# Altium PCB NFC_Business_Card.PcbDoc
Units mil, origin at the board's own origin, x right, y up, seen from the top; angles counter-clockwise.
Board outline 3500 x 2000 mil, 2 copper layers (Top Layer, Bottom Layer); 28 components, 25 nets, 82 pads, 18 vias.
Unrouted connection lines stored in the file: 1.
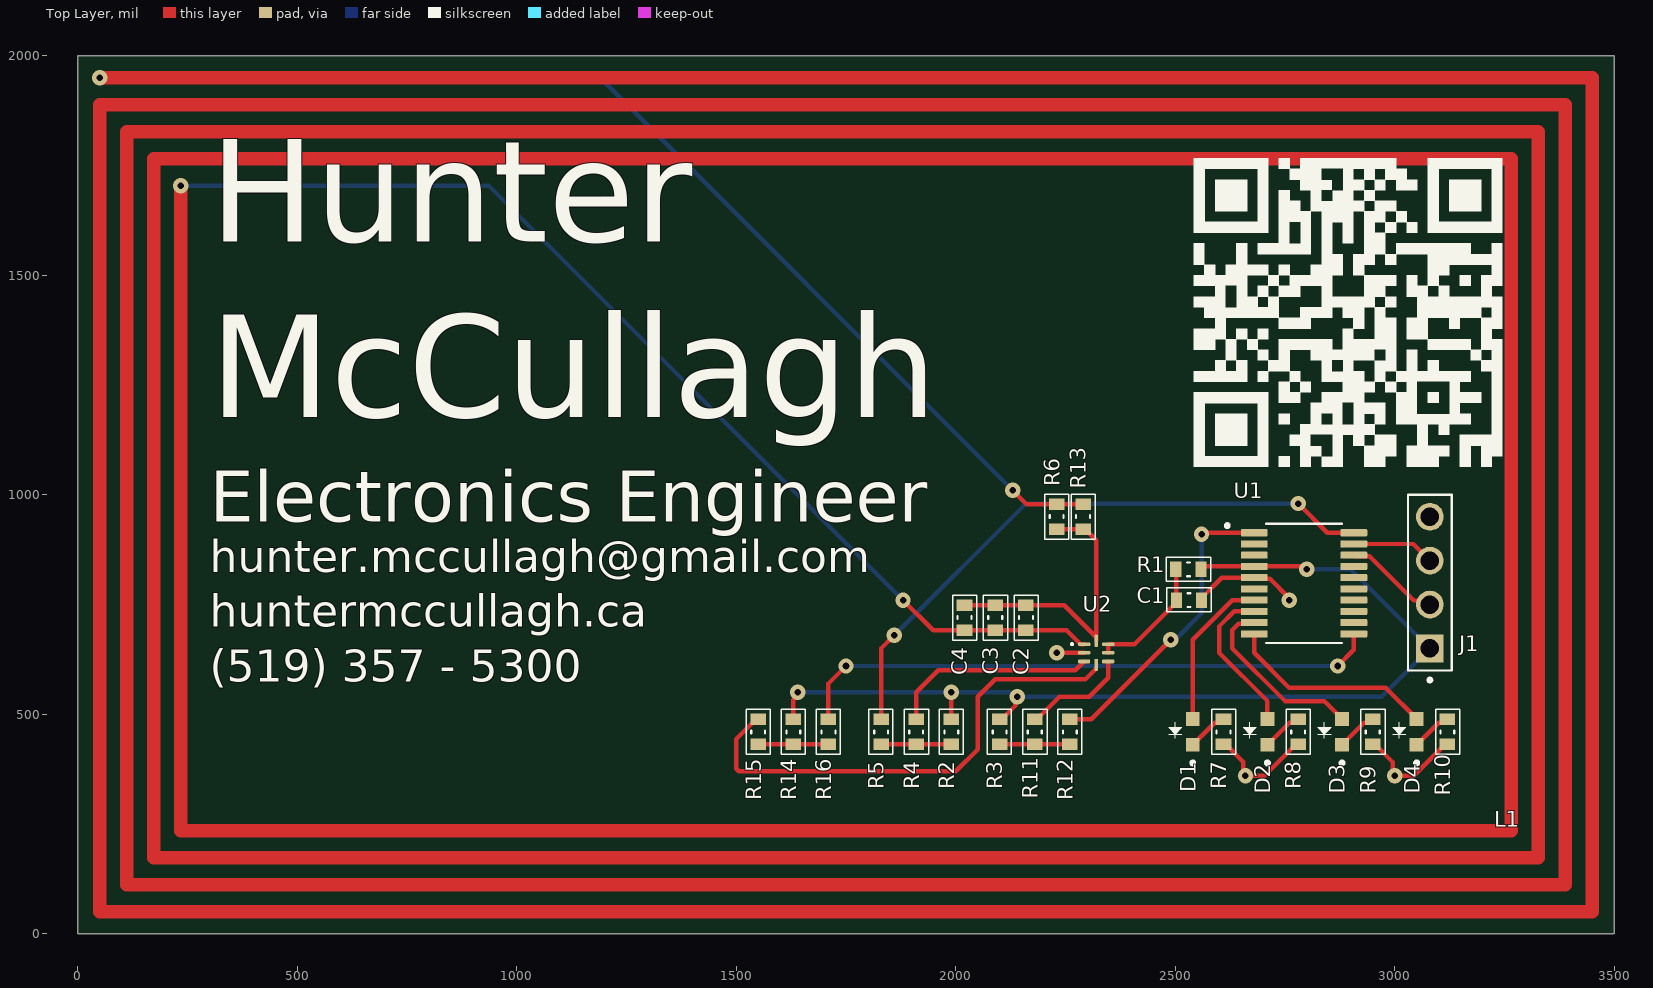
[diagram p0: Top Layer view]
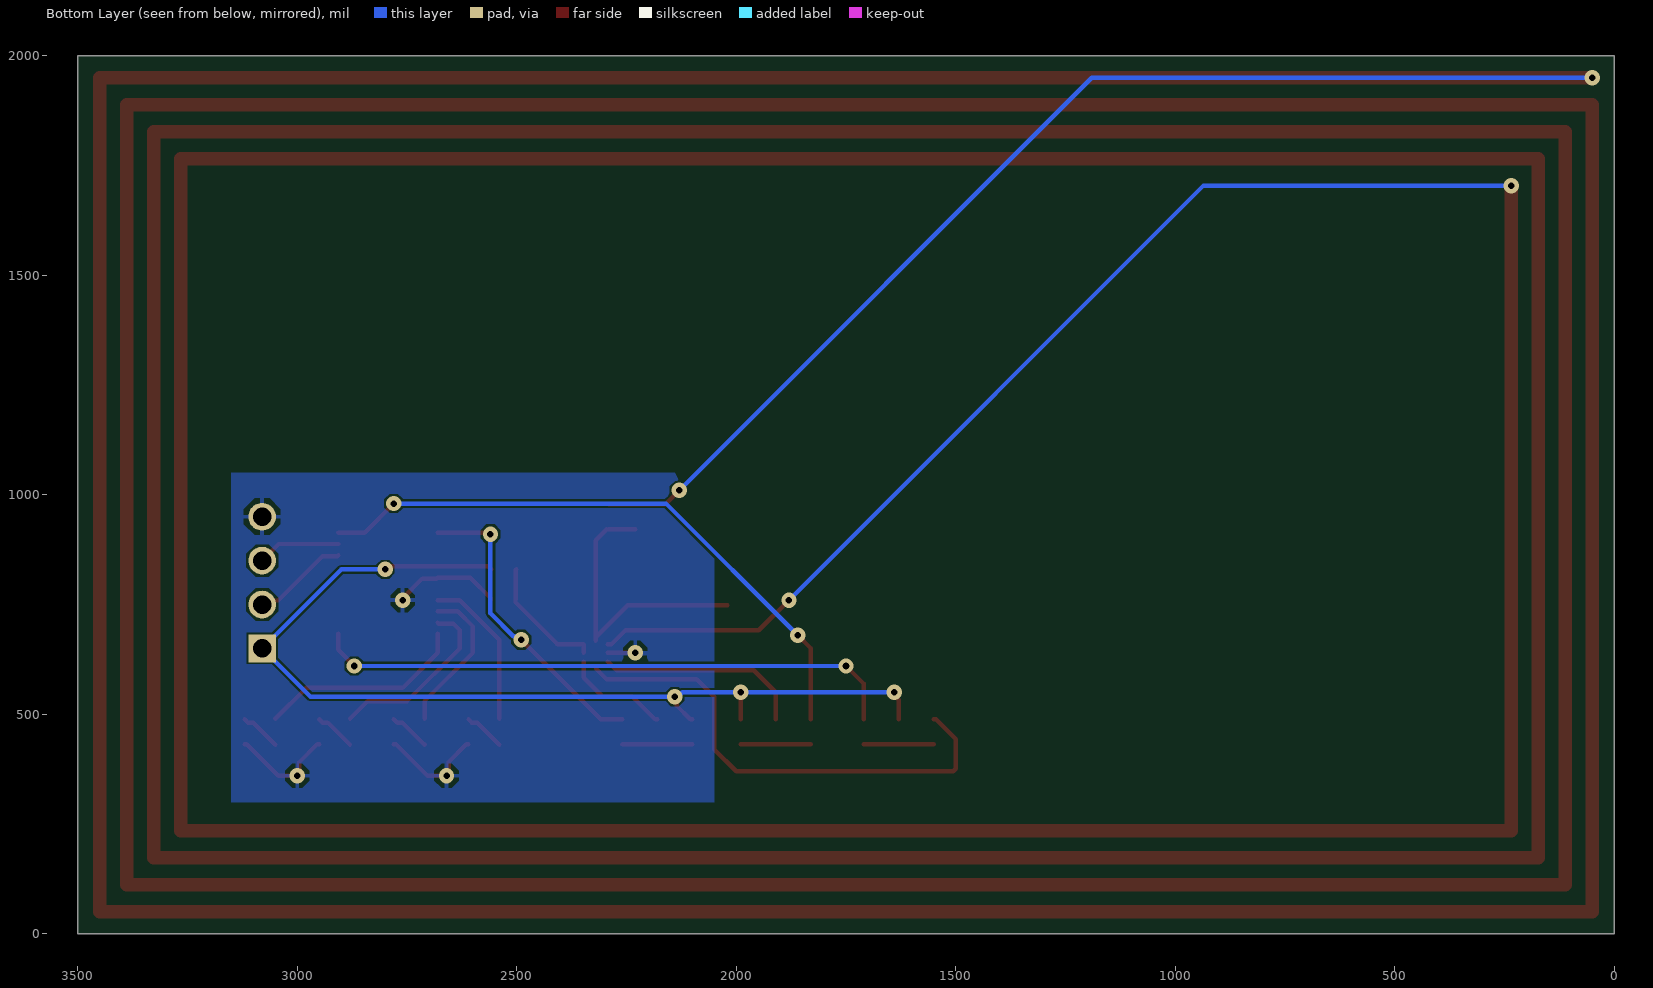
[diagram p1: Bottom Layer view, seen from below]
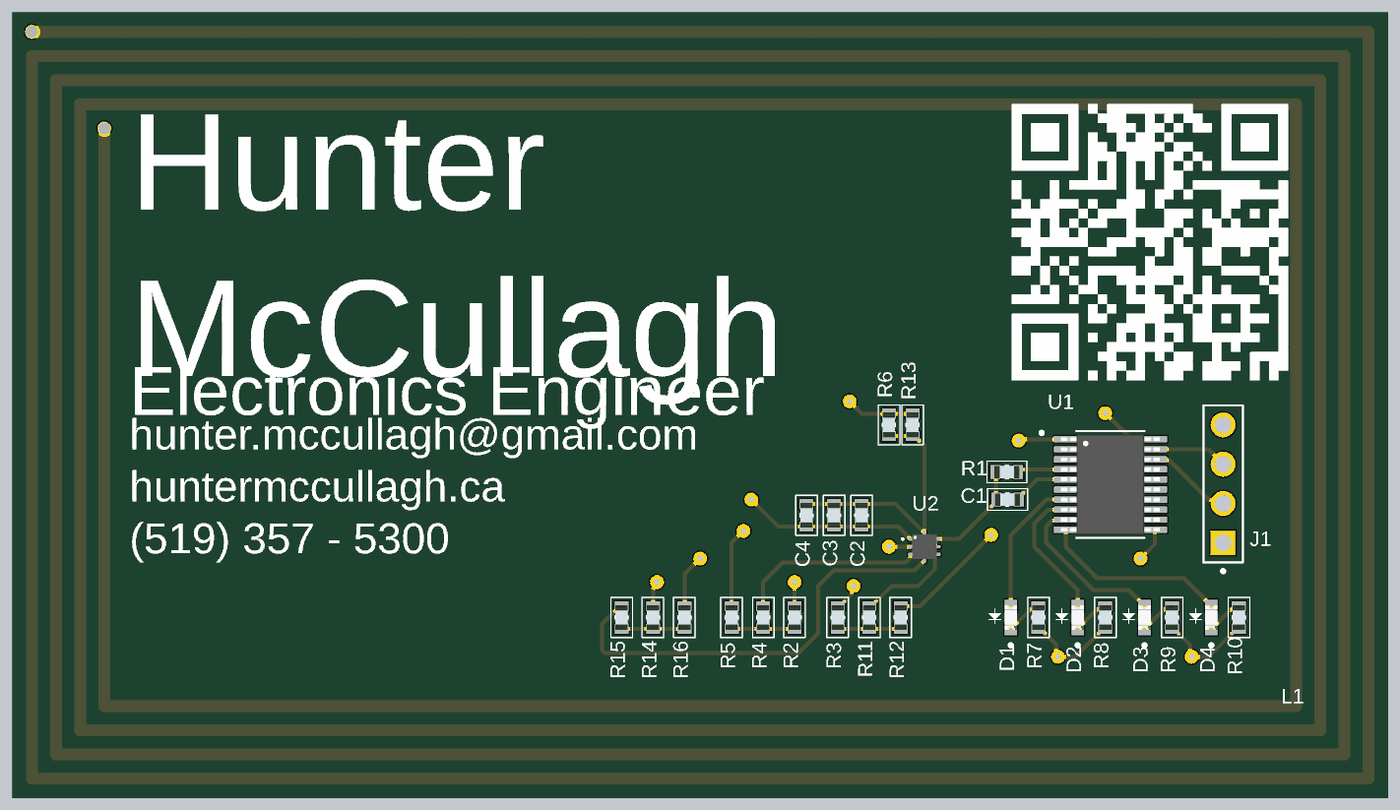
[diagram p2: 3D render of the assembled board from above, using the file's embedded part models]

## Layer stack, top to bottom
Top Solder: solder mask 0.4, Solder Resist, Dk 3.5
Top Layer: signal copper 1.4
Dielectric 1: dielectric 12.6, FR-4, Dk 4.8
Bottom Layer: signal copper 1.4
Bottom Solder: solder mask 0.4, Solder Resist, Dk 3.5

## Board outline
0,0 3500,0 3500,2000 0,2000

## Design rules (kind name [scope] priority, off if disabled: settings)
Clearance "Stitching GND" [IsStitchingVia and InNet('GND') vs (IsVia and (Not IsStitchingVia)) Or IsPad] p1: gap=5 ignorepadtopadclearanceinfootprint=FALSE
Clearance [All] p2: gap=5 ignorepadtopadclearanceinfootprint=FALSE
MinimumSolderMaskSliver [All] p1: minsoldermaskwidth=1
PolygonConnect [All] p1: connectstyle=Relief reliefconductorwidth=10 reliefentries=4 polygonreliefangle="90 Angle" airgapwidth=10
RoutingVias [All] p1: holewidth=28 width=50 viastyle="Through Hole" minholewidth=28 minwidth=50 maxholewidth=28 maxwidth=50
SilkToSilkClearance [All] p1: silktosilkclearance=1
SilkToSolderMaskClearance [IsPad] p1: minsilkscreentomaskgap=1 clearancetoexposedcopper=TRUE
SolderMaskExpansion [All] p1: expansion=4 istentingtop=FALSE
SupplyNets "Schematic Supply Nets_1" [InNet('+3v3')] p1: voltage=0.000
SupplyNets "Schematic Supply Nets" [InNet('GND')] p2: voltage=0.000
Width [All] p1: maxlimit=100 minlimit=5 preferedwidth=10 minimp=50.000000 maximp=50.000000 favimp=50.000000
27 further rules are at their usual default settings.

## Components (designator, comment, footprint, x,y, rotation, side; value= is the part's Value field where it differs from the comment)
C1 "150nF" "0603 PACKAGE" 2531.46,760 r180 top
C2 "0603_Capacitor" "0603 PACKAGE" 2160,720 r90 top
C3 "0603_Capacitor" "0603 PACKAGE" 2090,720 r90 top
C4 "0603_Capacitor" "0603 PACKAGE" 2020,720 r90 top
D1 "LED_0603" LED_KT-0603R 2540,460 r90 top
D2 "LED_0603" LED_KT-0603R 2710,460 r90 top
D3 "LED_0603" LED_KT-0603R 2880,460 r90 top
D4 "LED_0603" LED_KT-0603R 3050,460 r90 top
J1 "1x4 Header Pin" "1x4 Jumper" 3080,800 r90 top
L1 "Antenna_design_1" ANTENNA_DESIGN2 50,1950 r0 top locked
R1 "0Ω" "0603 PACKAGE" 2530,830 r180 top
R2 "10kΩ" "0603 PACKAGE" 1990,460 r270 top
R3 "10kΩ" "0603 PACKAGE" 2100,460 r270 top
R4 "0Ω" "0603 PACKAGE" 1910,460 r90 top
R5 "0Ω" "0603 PACKAGE" 1830,460 r270 top
R6 "0Ω" "0603 PACKAGE" 2230,950 r90 top
R7 "0603_Resistor" "0603 PACKAGE" 2610,460 r90 top
R8 "0603_Resistor" "0603 PACKAGE" 2780,460 r90 top
R9 "0603_Resistor" "0603 PACKAGE" 2950,460 r90 top
R10 "0603_Resistor" "0603 PACKAGE" 3120,460 r90 top
R11 "0Ω" "0603 PACKAGE" 2180,460 r90 top
R12 "0Ω" "0603 PACKAGE" 2260,460 r270 top
R13 "0Ω" "0603 PACKAGE" 2290,950 r90 top
R14 "10kΩ" "0603 PACKAGE" 1630,460 r270 top
R15 "0Ω" "0603 PACKAGE" 1550,460 r90 top
R16 "0Ω" "0603 PACKAGE" 1710,460 r270 top
U1 "STM32C011F4P6TR" SOP65P640X120-20N 2793.39,798.39 r0 top
U2 "NT3H2111W0FHKH" QFN8P50_160X160X50L40X20N 2320,640 r0 top

## Footprints (in the part's own frame and the unit in brackets; to place one, negate y for a bottom-side part, rotate by r counter-clockwise, add the part's x,y. Pads: shape width x height; smd on the part's side, far side on the other; paste and mask are expansions set on the pad)
"1x4 Jumper" [mm]
  rect 1.605x1.605 / inner round 1.605 / far side rect 1.605x1.605 hole 1.07: 1(-3.81,0)
  round 1.605 hole 1.07: 2(-1.27,0) 3(1.27,0) 4(3.81,0)
  silkscreen extent -5.74,-1.27 5.08,1.27
"0603 PACKAGE" [mm]
  rect 0.65x0.9 smd: 1(-0.725,0) 2(0.725,0)
  silkscreen extent -1.3,-0.71 1.3,0.69, body extent -0.8,-0.4 0.8,0.4, height 0.4
ANTENNA_DESIGN2 [mm]
  round 0.78 smd mask+0: 1(0,0) 2(4.68,-6.24)
  Top Layer lines w0.78: 0,0 86.36,0 86.36,-48.26 0,-48.26 0,-1.56 84.8,-1.56 84.8,-46.7 1.56,-46.7 1.56,-3.12 83.24,-3.12 83.24,-45.14 3.12,-45.14 3.12,-4.68 81.68,-4.68 81.68,-43.58 4.68,-43.58 4.68,-6.24
LED_KT-0603R [mm]
  rect 0.8x0.8 smd: A(0.75,0) C(-0.75,0)
  silkscreen extent -1.9,-0.1 0.56,1.4, body extent -0.8,-0.4 0.8,0.4, height 0.65
QFN8P50_160X160X50L40X20N [mm]
  rrect54% 0.71x0.22 smd: 1(-0.695,0.5) 2(-0.695,0)
  rrect54% 0.7x0.22 smd: 3(-0.695,-0.5) 5(0.695,-0.5) 6(0.695,0) 7(0.695,0.5)
  rrect54% 0.22x0.7 smd: 4(0,-0.695) 8(0,0.695)
  silkscreen extent -1.42,0.48 -1.38,0.52, body extent -0.8,-0.8 0.8,0.8, height 0.5
SOP65P640X120-20N [mm]
  rrect25% 1.56x0.41 smd: 1(-2.88,2.925) 2(-2.88,2.275) 3(-2.88,1.625) 4(-2.88,0.975) 5(-2.88,0.325) 6(-2.88,-0.325) 7(-2.88,-0.975) 8(-2.88,-1.625) 9(-2.88,-2.275) 10(-2.88,-2.925) 11(2.88,-2.925) 12(2.88,-2.275) 13(2.88,-1.625) 14(2.88,-0.975) 15(2.88,-0.325) 16(2.88,0.325) 17(2.88,0.975) 18(2.88,1.625) 19(2.88,2.275) 20(2.88,2.925)
  silkscreen extent -4.54,-3.45 2.2,3.45, body extent -3.2,-3.25 3.2,3.25, height 1.2

## Part data
C1: library part 0603_Capacitor
D1 D2 D3 D4: "Red 0603 Light Emitting Diodes", Package=Package, Check_prices=https://www.snapeda.com/parts/KT-0603R/Hubei+KENTO+Elec/view-part/?ref=eda, MF="Hubei KENTO Elec", MP=KT-0603R, SnapEDA_Link=https://www.snapeda.com/parts/KT-0603R/Hubei+KENTO+Elec/view-part/?ref=snap
J1: "2.54mm (0.1) Pitch SIL Vertical Throughboard Pin Header, 7mm mating pin height, tin, 4 contacts", Package=None, Check_prices=https://www.snapeda.com/parts/M20-9730446/Harwin/view-part/?ref=eda, MF=Harwin, MP=M20-9730446, SnapEDA_Link=https://www.snapeda.com/parts/M20-9730446/Harwin/view-part/?ref=snap
R1 R2 R3 R4 R5 R6 R11 R12 R13 R14 R15 R16: library part 0603_Resistor
U1: "ARMÂ® CortexÂ®-M0+ STM32C0 Microcontroller IC 32-Bit 48MHz 16KB (16K x 8) FLASH 20-TSSOP", Package=None, Check_prices=https://www.snapeda.com/parts/STM32C011F4P6TR/STMicroelectronics/view-part/?ref=eda, MF=STMicroelectronics, MP=STM32C011F4P6TR, SnapEDA_Link=https://www.snapeda.com/parts/STM32C011F4P6TR/STMicroelectronics/view-part/?ref=snap
U2: "RFID Reader/Transponder IC 13.56MHz ISO 14443, NFC IÂ²C 1.67V ~ 3.6V 8-XFQFN Exposed Pad", Package=Package, Check_prices=https://www.snapeda.com/parts/NT3H2111W0FHKH/NXP+Semiconductors/view-part/?ref=eda, MF="NXP USA", MP=NT3H2111W0FHKH, SnapEDA_Link=https://www.snapeda.com/parts/NT3H2111W0FHKH/NXP+Semiconductors/view-part/?ref=snap

## Via types
v1: diameter 35, hole 15, Top Layer to Bottom Layer, 18 vias

## Nets (pads, with @x,y where several pads share a name; then routed paths per layer and width w, separated by ;. In a path a pad name is that pad's centre, name@x,y a point inside that pad or via, vN(x,y) a via of type N, cw(c..) or ccw(c..) an arc to the next point about the centre after c; other vN are vias at no path point)
+3v3: J1.1 R1.1 R2.1 R3.1 R14.1 U1.4 | length 2289.3
  Top Layer w10: R14.1 1630,533.24 1640,543.24 v1(1640,550) ; R2.1 v1(1990,550) ; R3.1 2104.92,488.54 2135.22,518.84 2135.22,535.22 v1(2140,540) ; R1.1 2565.31,836.77 U1.4 2793.23,836.77 v1(2800,830)
  Bottom Layer w10: v1(1640,550) v1(1990,550) 2123.24,550 2133.24,540 v1(2140,540) 2970,540 J1.1 2900,830 v1(2800,830)
GND: C1.1 J1.4 R7.1 R8.1 R9.1 R10.1 U1.5 U2.2 | length 799.8
  Top Layer w10: v1(2230,640) U2.2 ; C1.1 2560,764.92 2606.26,811.18 U1.5 2682.52,808.66 2715.74,808.66 2760,764.4 v1(2760,760) ; R7.1 2614.92,431.46 2655.22,391.16 2655.22,364.78 v1(2660,360) 2703.62,360 2775.08,431.46 R8.1 ; R9.1 2954.92,431.46 2995.22,391.16 2995.22,364.78 v1(3000,360) 3043.62,360 3115.08,431.46 R10.1
la: C2.1 C3.1 C4.1 L1.1 U2.1 | length 2497.9
  Top Layer w10: v1(234.25,1704.33) v1@239.04,1699.55 ; v1(1880,760) 1948.54,691.46 C3.1 C2.1 2252.56,691.46 2284.33,659.68 U2.1
  Bottom Layer w10: v1(234.25,1704.33) 935.67,1704.33 v1(1880,760)
lb: C2.2 C3.2 C4.2 R6.1 R13.1 U2.8 | length 654.7
  Top Layer w10: C4.2 C3.2 C2.2 2246.93,748.54 U2.8@2320,675.47 ; R6.1 R13.1 ; R13.1@2294.92,921.46 2320,896.38 U2.8@2320,675.47 ; U2.8 U2.8@2320,675.47
led_blue: D2.A U1.8 | length 350.3
  Top Layer w10: U1.8 2634.41,734.41 2600,700 2600,640 2710,530 D2.A
led_green: D3.A U1.9 | length 415.5
  Top Layer w10: U1.9 2677.48,706.3 2644.26,706.3 2630,692.04 2630,650 2750,530 2839.53,530 D3.A
led_red: D1.A U1.7 | length 357.8
  Top Layer w10: D1.A 2540,670 2630,760 U1.7
led_white: D4.A U1.10 | length 475.6
  Top Layer w10: U1.10 2680,640 2760,560 2979.53,560 D4.A
NetD1_C: D1.C R7.2 | length 95.4
  Top Layer w10: D1.C@2540.98,431.46 D1.C 2590.28,480.75 2602.2,480.75 R7.2
NetD2_C: D2.C R8.2 | length 95.4
  Top Layer w10: D2.C@2710.98,431.46 D2.C 2760.28,480.75 2772.2,480.75 R8.2
NetD3_C: D3.C R9.2 | length 95.4
  Top Layer w10: D3.C@2880.98,431.46 D3.C 2930.28,480.75 2942.2,480.75 R9.2
NetD4_C: D4.C R10.2 | length 95.4
  Top Layer w10: D4.C@3050.98,431.46 D4.C 3100.28,480.75 3112.2,480.75 R10.2
NetL1_2: L1.2 R6.2 R13.2 | length 2642.4
  Top Layer w10: v1(2130,1010) 2161.46,978.54 R6.2 R13.2
  Bottom Layer w10: v1(50,1950) 1190,1950 v1(2130,1010)
NetR2_2: R2.2 R4.1 R5.2 | length 160
  Top Layer w10: R5.2 R4.1 R2.2
NetR3_2: R3.2 R11.1 R12.2 | length 160
  Top Layer w10: R3.2 R11.1 R12.2
NetR14_2: R14.2 R15.1 R16.2 | length 160
  Top Layer w10: R15.1 R14.2 R16.2
nfc_alert: R15.2 U2.4 | length 1125.2
  Top Layer w10: R15.2 1545.08,488.54 1500,443.46 1500,375.86 1505.86,370 2000,370 2050,420 2050,540 2090,580 2295.47,580 U2.4@2319.33,603.86
nfc_scl: R4.2 U2.3 | length 473.2
  Top Layer w10: R4.2 1910,550 1960,600 2272.32,600 U2.3
nfc_sda: R11.2 U2.5 | length 242.9
  Top Layer w10: R11.2 2184.92,488.54 2236.38,540 2304.12,540 2347.25,583.13 U2.5@2347.25,619.65
stm_alert: R16.1 U1.11 | length 1346.5
  Top Layer w10: R16.1 1710,570 v1(1750,610) ; v1(2870,610) 2906.77,646.77 U1.11
  Bottom Layer w10: v1(1750,610) v1(2870,610)
stm_scl: R5.1 U1.20 | length 1402.4
  Top Layer w10: R5.1 1830,650 v1(1860,680) ; v1(2780,980) 2846.46,913.54 U1.20
  Bottom Layer w10: v1(1860,680) 2160,980 v1(2780,980)
stm_sda: R12.1 U1.1 | length 701.5
  Top Layer w10: R12.1 2308.54,488.54 v1(2490,670) ; v1(2560,910) 2563.54,913.54 U1.1
  Bottom Layer w10: v1(2490,670) 2496.76,670 2504.75,677.98 2507.98,677.98 2560,730 v1(2560,910)
swclk: J1.3 U1.19 | length 188.9
  Top Layer w10: U1.19 3042.05,887.95 J1.3
swdio: J1.2 U1.18 | length 219.8
  Top Layer w10: U1.18 2909.29,859.84 2942.51,859.84 3043.23,759.12 3070.88,759.12 J1.2
Vout: C1.2 R1.2 U2.6 U2.7 | length 290.3
  Top Layer w10: U2.6 U2.7 2407.52,659.68 2502.91,755.08 C1.2 2502.18,760.73 2502.18,829.27 R1.2
pads on no net: U1.2 U1.3 U1.6 U1.12 U1.13 U1.14 U1.15 U1.16 U1.17

## Polygon pours and split planes (outlines as drawn)
GND on Bottom Layer "GND_L02_P000" (solid, pour order 0): 3150,300 3150,1050 2050,1050 2050,300

## Silkscreen, mask and mechanical layers (free items; w line width, h text height)
Top Overlay:
  drawing of 43 lines, arcs and shapes, not listed
  text "Hunter / McCullagh" at 300,1100 h400
  text "Electronics Engineer" at 300,900 h200
  text "hunter.mccullagh@gmail.com / huntermccullagh.ca / (519) 357 - 5300" at 300,550 h125
Board Outline:
  the board outline again, w1